# Altium PCB MQ.PcbDoc
Units mm, origin at the board's own origin, x right, y up, seen from the top; angles counter-clockwise.
Board outline 152.4 x 101.6 mm, 2 copper layers (Top Layer, Bottom Layer); 15 components, 8 nets, 41 pads, 5 vias.
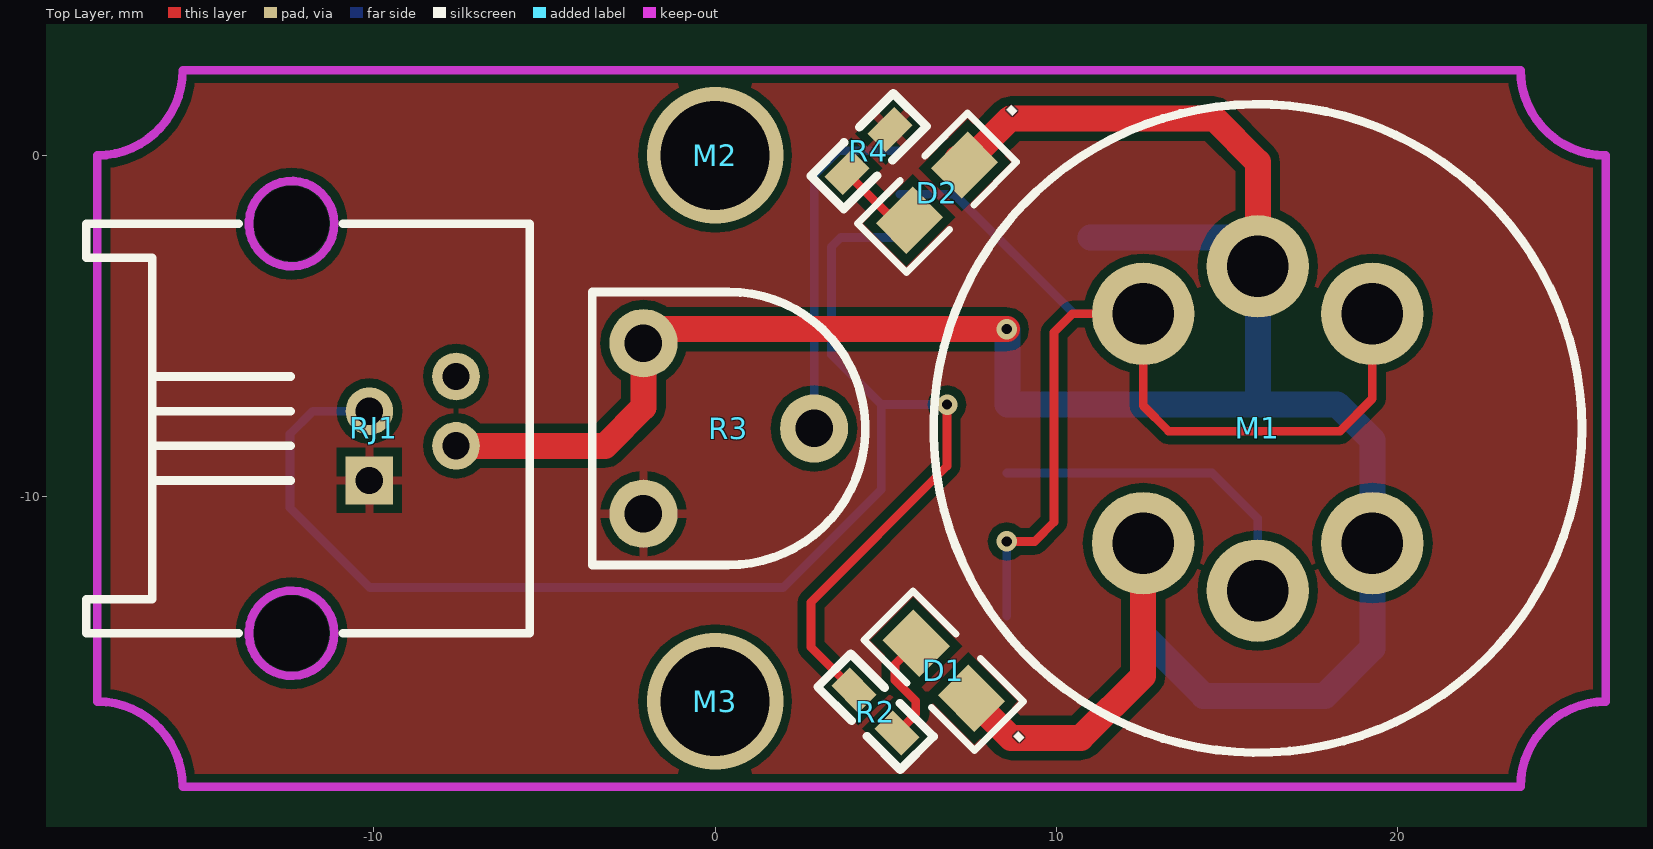
[diagram p0: Top Layer view]
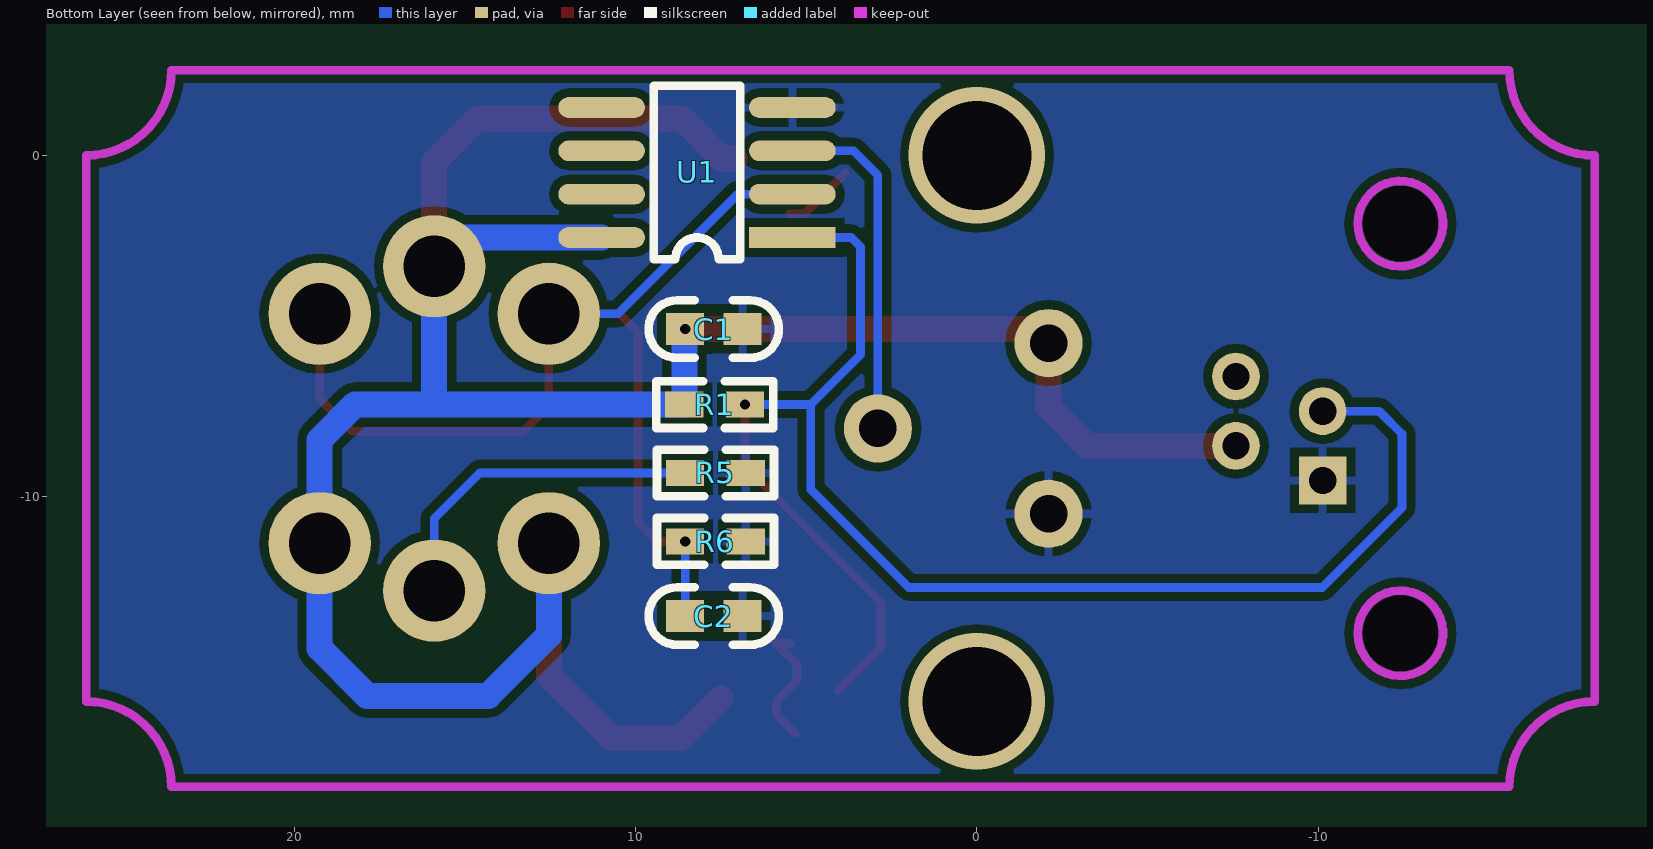
[diagram p1: Bottom Layer view, seen from below]
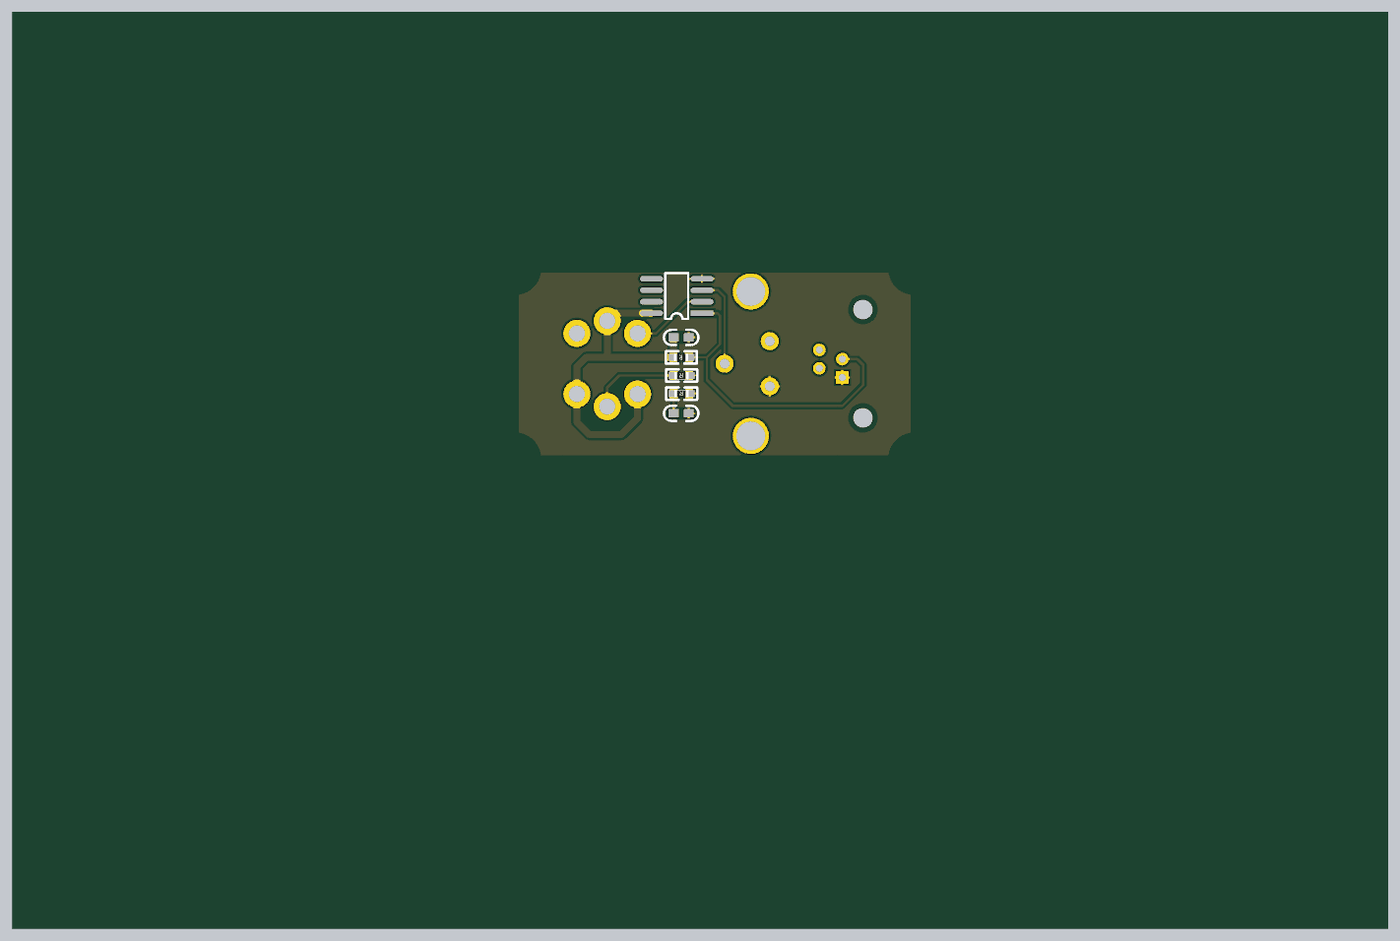
[diagram p2: 3D render of the assembled board from below, using the file's embedded part models]

## Layer stack, top to bottom
Top Solder: solder mask 0.0102, Solder Resist, Dk 3.5
Top Layer: signal copper 0.0356
Dielectric 1: dielectric 0.32, FR-4, Dk 4.8
Bottom Layer: signal copper 0.0356
Bottom Solder: solder mask 0.0102, Solder Resist, Dk 3.5

## Board outline
-70.6,-70.6 81.8,-70.6 81.8,31 -70.6,31

## Design rules (kind name [scope] priority, off if disabled: settings)
Clearance [All] p1: gap=0.254
ComponentClearance [All] p1 off: gap=0.254 collisioncheckmode=3 verticalgap=0.254 showdistances=FALSE
PolygonConnect [All] p1: connectstyle=Relief reliefconductorwidth=0.254 reliefentries=4 polygonreliefangle="90 Angle" airgapwidth=0.254
RoutingVias [All] p1: holewidth=0.711 width=1.27 viastyle="Through Hole" minholewidth=0.711 minwidth=1.27 maxholewidth=0.711 maxwidth=1.27
SolderMaskExpansion [All] p1: expansion=0.102
Width [All] p1: maxlimit=4.54 minlimit=0.254 preferedwidth=0.254
28 further rules are at their usual default settings.

## Components (designator, comment, footprint, x,y, rotation, side; value= is the part's Value field where it differs from the comment)
C1 "Cap" 0603_C 7.71,-5.089 r90 bottom
C2 "Cap" 0603_C 7.71,-13.496 r90 bottom
D1 "LED" 0805 6.7,-15.1 r45 top
D2 "LED" 0805 6.502,-1.092 r135 top
M1 "MQ" MQ 15.9,-8 r180 top
M2 "M3" M3 0,0 r0 top
M3 "M3" M3 0,-16 r0 top
R1 "Res2" 0603_R 7.685,-7.299 r270 bottom
R2 "Res2" 0603_R 4.7,-16.3 r45 top
R3 "RPot" 电位器 0.4,-8 r90 top
R4 "Res2" 0603_R 4.496,0.127 r315 top
R5 "Res2" 0603_R 7.66,-9.305 r270 bottom
R6 "Res2" 0603_R 7.66,-11.312 r270 bottom
RJ1 "RJ11" RJ11 -10,-8 r90 top
U1 "LM393" SO-8 8.2,-0.5 r270 bottom

## Footprints (in the part's own frame and the unit in brackets; to place one, negate y for a bottom-side part, rotate by r counter-clockwise, add the part's x,y. Pads: shape width x height; smd on the part's side, far side on the other; paste and mask are expansions set on the pad)
0603_C [mil]
  rect 37x44 smd: 1(0,-33) 2(0,33)
  silkscreen extent -33,-75 33,75
0603_R [mil]
  rect 30x44 smd: 1(0,35) 2(0,-35)
  silkscreen extent -27,-67 27,68, body extent -19,-52 20,50, height 21
0805 [mil]
  rect 50x60 smd: 1(0,-45) 2(0,45)
  silkscreen extent -40,-90 40,90
M3 [mm]
MQ [mm]
  round 3 hole 1.8: 1(3.359,3.359) 2(0,4.75) 3(-3.359,3.359) 4(-3.359,-3.359) 5(0,-4.75) 6(3.359,-3.359)
  silkscreen extent -9.5,-9.5 9.5,9.5
RJ11 [mm]
  round 2.1 hole 2.2 unplated: 0(-6,2.41) 0(6,2.41)
  rect 1.397x1.397 hole 0.8: 1(-1.524,0.13)
  round 1.397 hole 0.8: 2(-0.508,-2.41) 3(0.508,0.13) 4(1.524,-2.41)
  Keep-Out Layer circle w0.254: c-6,2.41 r1.25
  Keep-Out Layer circle w0.254: c6,2.41 r1.25
  silkscreen extent -6,-4.57 6,8.43
SO-8 [mil]
  rect 24x100 smd: 1(75,110)
  oval 24x100 smd: 2(25,110) 3(-25,110) 4(-75,110) 5(-75,-110) 6(-25,-110) 7(25,-110) 8(75,-110)
  silkscreen extent -100,-50 100,50
电位器 [mm]
  round 2 hole 1.1: 1(-2.5,2.5) 2(2.5,2.5) 3(0,-2.5)
  silkscreen extent -4,-4 4,4

## Part data
C1 C2: "Capacitor"
D1 D2: library part LED1, "Typical RED GaAs LED"
R1 R2 R4 R5 R6: "Resistor"
R3: "Potentiometer"

## Via types
v1: diameter 0.6, hole 0.3, Top Layer to Bottom Layer, 3 vias
v2: diameter 4, hole 3.2, Top Layer to Bottom Layer, 2 vias

## Nets (pads, with @x,y where several pads share a name; then routed paths per layer and width w, separated by ;. In a path a pad name is that pad's centre, name@x,y a point inside that pad or via, vN(x,y) a via of type N, cw(c..) or ccw(c..) an arc to the next point about the centre after c; other vN are vias at no path point)
A+: R3.3 U1.3 | length 10.2
  Bottom Layer w0.254: R3.3 2.9,-0.577 3.612,0.135 U1.3
A-: C2.2 M1.4 M1.6 R6.2 U1.2 | length 33.4
  Top Layer w0.254: v1(8.549,-11.312) 9.364,-11.312 9.931,-10.744 9.931,-5.182 10.472,-4.641 M1.6 12.541,-7.334 13.284,-8.077 18.313,-8.077 19.259,-7.132 M1.4
  Bottom Layer w0.254: U1.2 7.008,-1.135 10.514,-4.641 M1.6 ; C2.2 v1(8.549,-11.312)
GND: C1.1 C2.1 R3.1 R4.1 R5.1 R6.1 RJ1.1 U1.4
NetD1_2: D1.2 R2.2 | length 3.8
  Top Layer w0.254: R2.2 5.882,-16.376 5.882,-15.985 5.272,-15.376 5.272,-14.912 D1.2 D1.2@5.451,-14.292
NetD2_2: D2.2 R4.2 | length 2.1
  Top Layer w0.254: R4.2@3.856,-0.513 5.051,-1.708 D2.2@5.492,-1.708
NetM1_2: M1.2 R5.2 | length 10
  Bottom Layer w0.254: R5.2 14.568,-9.305 15.9,-10.637 M1.2
OUT_A: R1.1 R2.1 RJ1.3 U1.1 | length 46.5
  Top Layer w0.254: R2.1 2.808,-14.408 2.808,-13.09 6.796,-9.102 v1(6.796,-7.299)
  Bottom Layer w0.254: RJ1.3 -11.787,-7.492 -12.457,-8.162 -12.457,-10.321 -10.12,-12.658 1.995,-12.658 4.866,-9.788 4.866,-7.299 3.408,-5.841 3.408,-2.676 3.679,-2.405 U1.1 ; 4.942,-7.299 v1(6.796,-7.299)
VCC: C1.2 D1.1 D2.1 M1.1 M1.3 M1.5 R1.2 R3.2 RJ1.2 U1.8 | length 81.1
  Top Layer w0.762: RJ1.2 -3.225,-8.508 -2.1,-7.383 R3.2 -1.689,-5.089 v1(8.549,-5.089) ; D2.1@7.108,-0.092 7.477,-0.092 8.653,1.083 14.619,1.083 15.9,-0.197 M1.5 ; D1.1 8.669,-17.069 10.719,-17.069 12.541,-15.246 M1.1
  Bottom Layer w0.762: v1(8.549,-5.089) 8.574,-5.114 R1.2 18.226,-7.299 19.259,-8.331 M1.3 19.259,-14.445 17.87,-15.833 14.314,-15.833 12.541,-14.06 M1.1 ; U1.8 15.055,-2.405 M1.5 15.9,-7.248
pads on no net: RJ1.0 RJ1.4 U1.5 U1.6 U1.7
copper on no net:
  other v2: 0,-16 0,0

## Polygon pours and split planes (outlines as drawn)
GND on Bottom Layer "Top Layer-No Net" (solid, remove dead copper, pour order 2): -19.558,3.683 26.899,3.683 27.635,2.946 27.457,2.769 27.457,-20.93 -16.967,-20.93 -18.974,-18.923
GND on Top Layer "Top Layer-No Net" (solid, remove dead copper, pour order 4): -19.431,3.785 -19.05,3.404 27.559,3.404 27.559,-19.685 26.467,-20.777 25.679,-19.99 -18.923,-19.99

## Keep-outs
Keep-Out Layer:
  lines w0.254: -18.1,-16 cw(c-18.1,-18.5) -15.6,-18.5 23.6,-18.5 cw(c26.1,-18.5) 26.1,-16 26.1,0 cw(c26.1,2.5) 23.6,2.5 -15.6,2.5 cw(c-18.1,2.5) -18.1,0 -18.1,-16

## Silkscreen, mask and mechanical layers (free items; w line width, h text height)
Top Overlay:
  text "." at 8.56,0.991 h1.52 r45
  text "." at 8.763,-17.374 h1.52 r45

## Text inside footprints (layer, text, board x,y; h text height)
RJ1: Mechanical 1 "1" at -12.43,-9.778 h1 r270; Mechanical 1 "2" at -6.842,-8.762 h1 r270; Mechanical 1 "3" at -12.43,-7.746 h1 r270; Mechanical 1 "4" at -6.842,-6.73 h1 r270; Mechanical 1 "1" at -17.002,-10.032 h1 r270; Mechanical 1 "4" at -17.002,-6.476 h1 r270